# Altium PCB SBM_BMS.PcbDoc (part 4 of 4)
Units mil, origin at the board's own origin, x right, y up, seen from the top; angles counter-clockwise.
Board outline 7537.59 x 2875 mil, 2 copper layers (Top Layer, Bottom Layer), stack 64.961 mil thick; 180 components, 137 nets, 631 pads, 494 vias.
Unrouted connection lines stored in the file: 10.
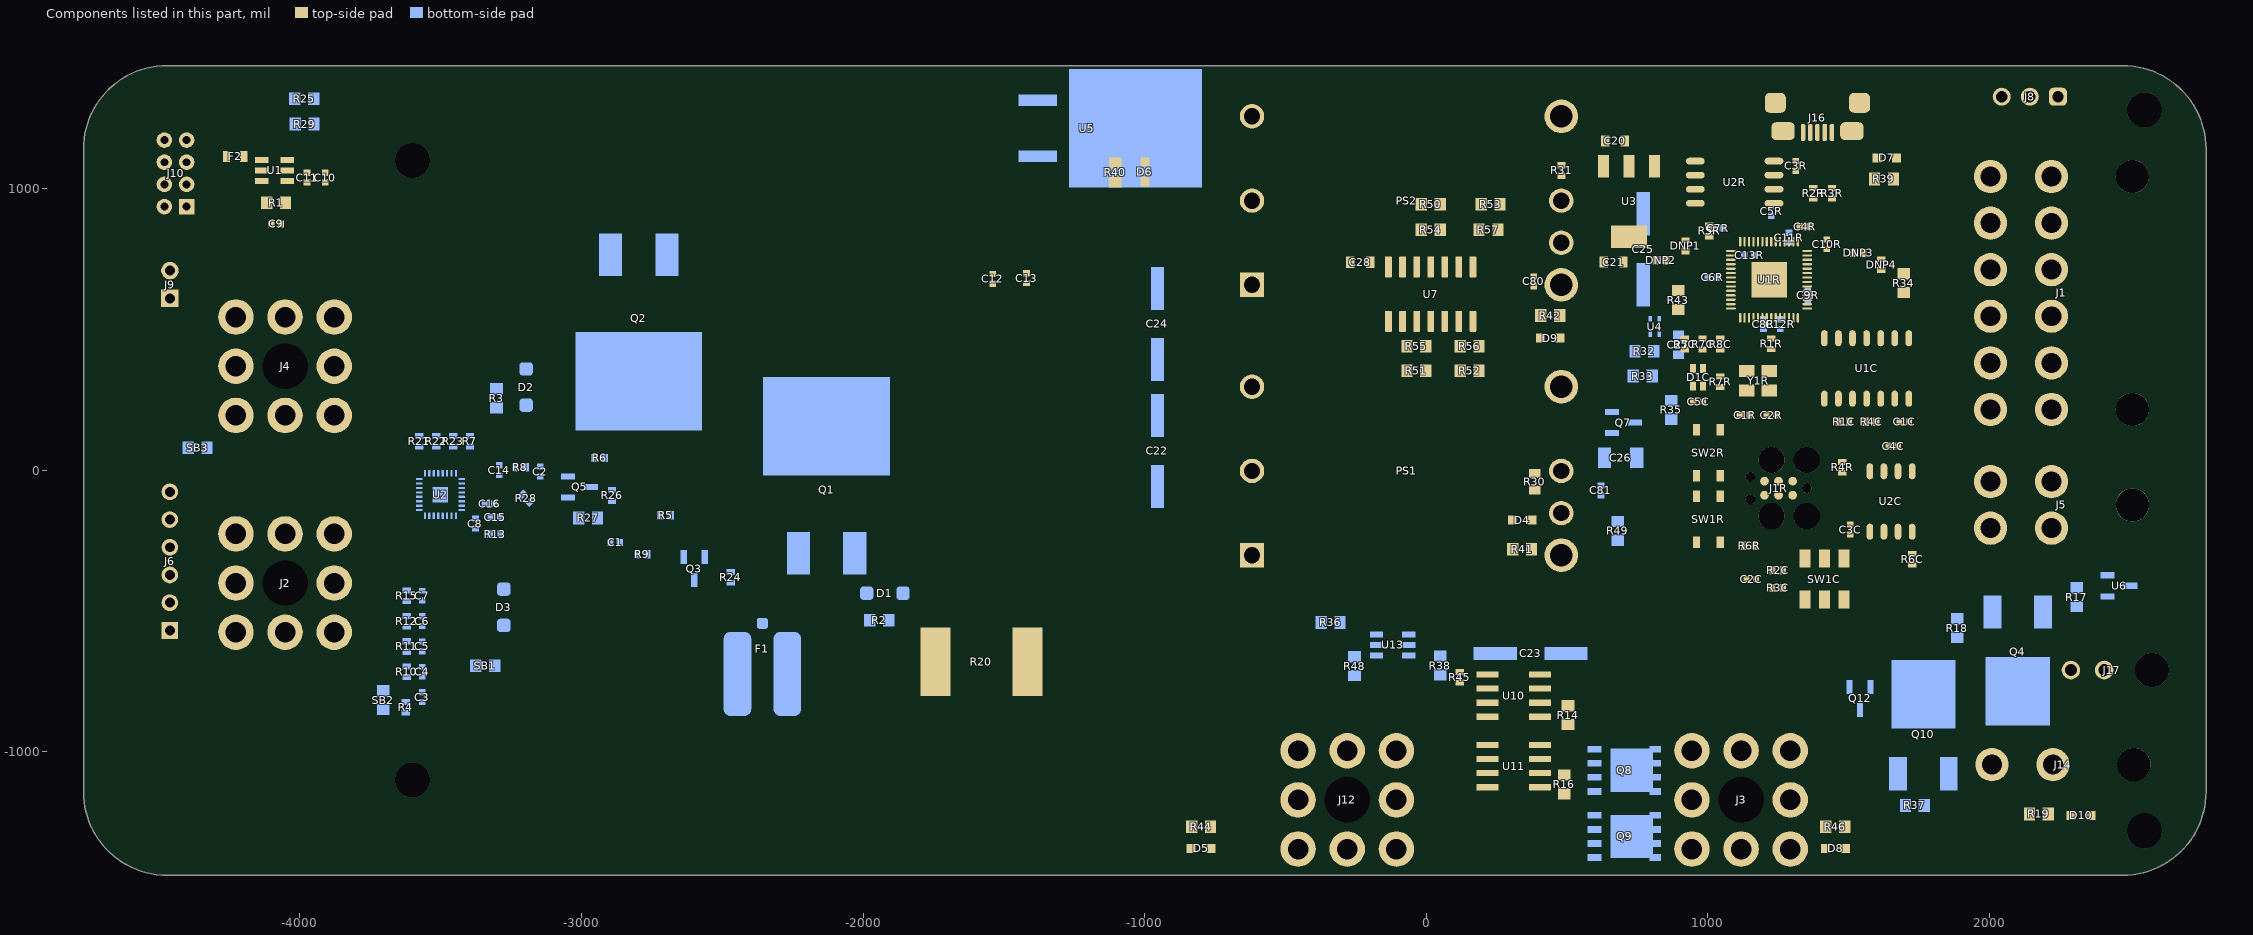
[diagram p3: the components of this part, seen from the top]

## Silkscreen, mask and mechanical layers (free items; w line width, h text height) (continued)
Bottom Overlay:
  lines w6: -3627,161 -3537,161 -3527,156
  lines w10: -2242,-919 -2242,-899 ; -2222,-899 -2242,-899 ; -2192,-949 -2242,-899
  text "Detext" at 1910,1101.65 h20 r90
  text "Vreg" at 1906.66,936.65 h20 r90
  text "Vreg" at 1906.66,761.65 h20 r90
  text "5V" at 1910,591.66 h20 r90
  text "CANH" at 1910,436.65 h20 r90
  text "CANL" at 2135,411.65 h20 r90
  text "12V" at 1910,274.99 h20 r90
  text "Kill" at 1910,-20.01 h20 r90
  text "Aux" at 1910,-173.34 h20 r90
  text "MOTOR+" at 1328.24,-824.98 h100
  text "GND" at -251.71,-874.98 h100
  text "Battery Fuse / If this is the problem... Godspeed / <3" at -1900,-1200 h30
Mechanical 1:
  circle w0.5: c0.01,0 r62.5
  circle w0.5: c-2451.99,16 r62.5
  lines w0.5: -4768.79,-1139.59 -4768.79,1145.12 ; -4470.88,-1437.5 2468.53,-1437.5 ; -4168.79,1437.5 2476.41,1437.5 ; 2768.8,-1137.23 2768.8,837.5
  lines w47.24: -4769.29,-1155 -4769.29,1145 ; -4768.79,-1139.59 ccw(c-4470.88,-1139.59) -4470.88,-1437.5 ; -4768.79,1145.12 cw(c-4476.42,1145.12) -4476.42,1437.5 2475,1437.5 ; -4475,-1437.51 2470,-1437.5 ; 2468.53,-1437.5 ccw(c2468.53,-1137.23) 2768.8,-1137.23 ; 2476.41,1437.5 cw(c2476.41,1145.1) 2768.8,1145.1 2768.8,-1150

## Text inside footprints (layer, text, board x,y; h text height)
U5: Bottom Overlay "*" at -1405,977.5 h50 r270; Mechanical 13 "*" at -1271,1102.5 h50 r270
U10: Top Overlay "*" at 194.5,-708 h50; Mechanical 13 "*" at 235.5,-756.5 h50
U11: Top Overlay "*" at 194.5,-958 h50; Mechanical 13 "*" at 235.5,-1006.5 h50
U13: Bottom Overlay "*" at -199.5,-672.4 h50 r180; Mechanical 13 "*" at -151,-628 h50 r180